# Altium PCB PCB prueba.PcbDoc
Units mm, origin at the board's own origin, x right, y up, seen from the top; angles counter-clockwise.
Board outline 72.52 x 73.28 mm, 2 copper layers (Top Layer, Bottom Layer); 36 components, 22 nets, 140 pads, 0 vias.
Unrouted connection lines stored in the file: 74.
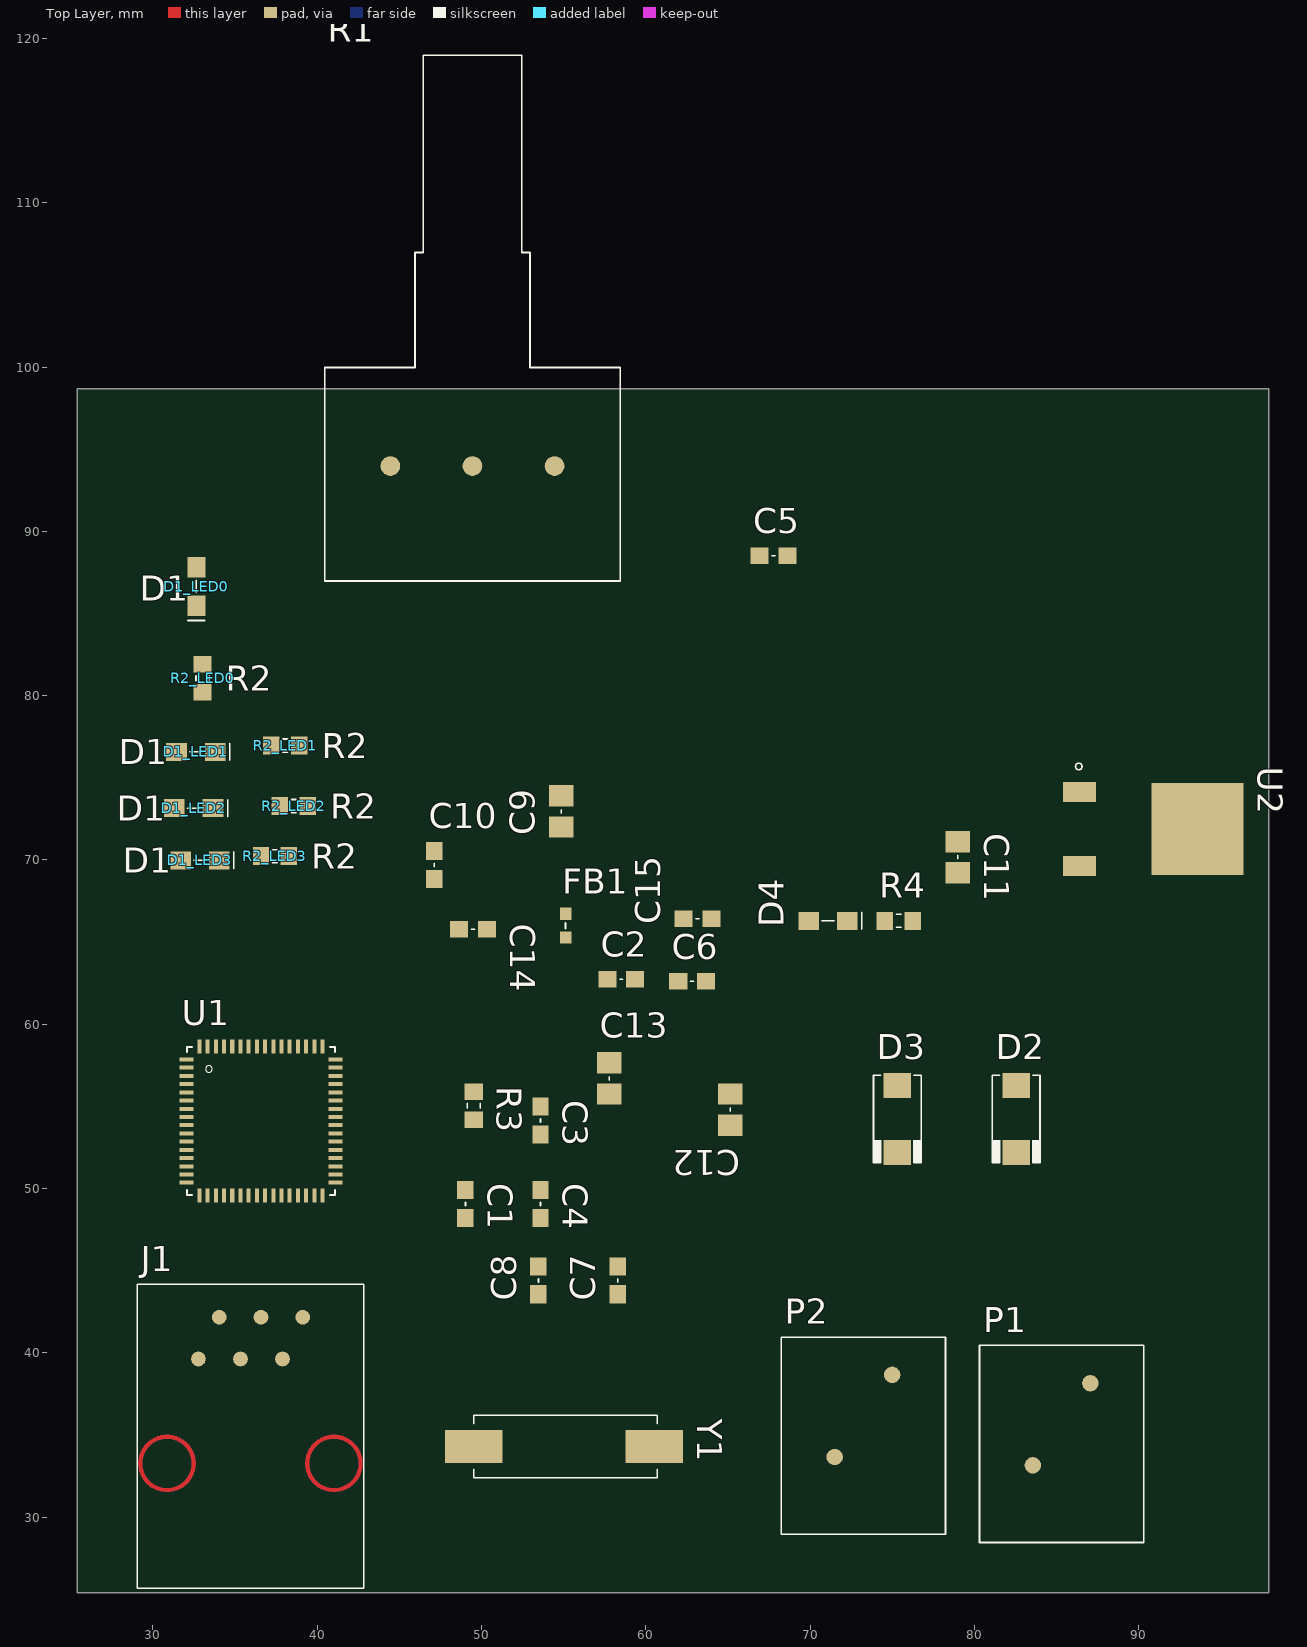
[diagram p0: Top Layer view]
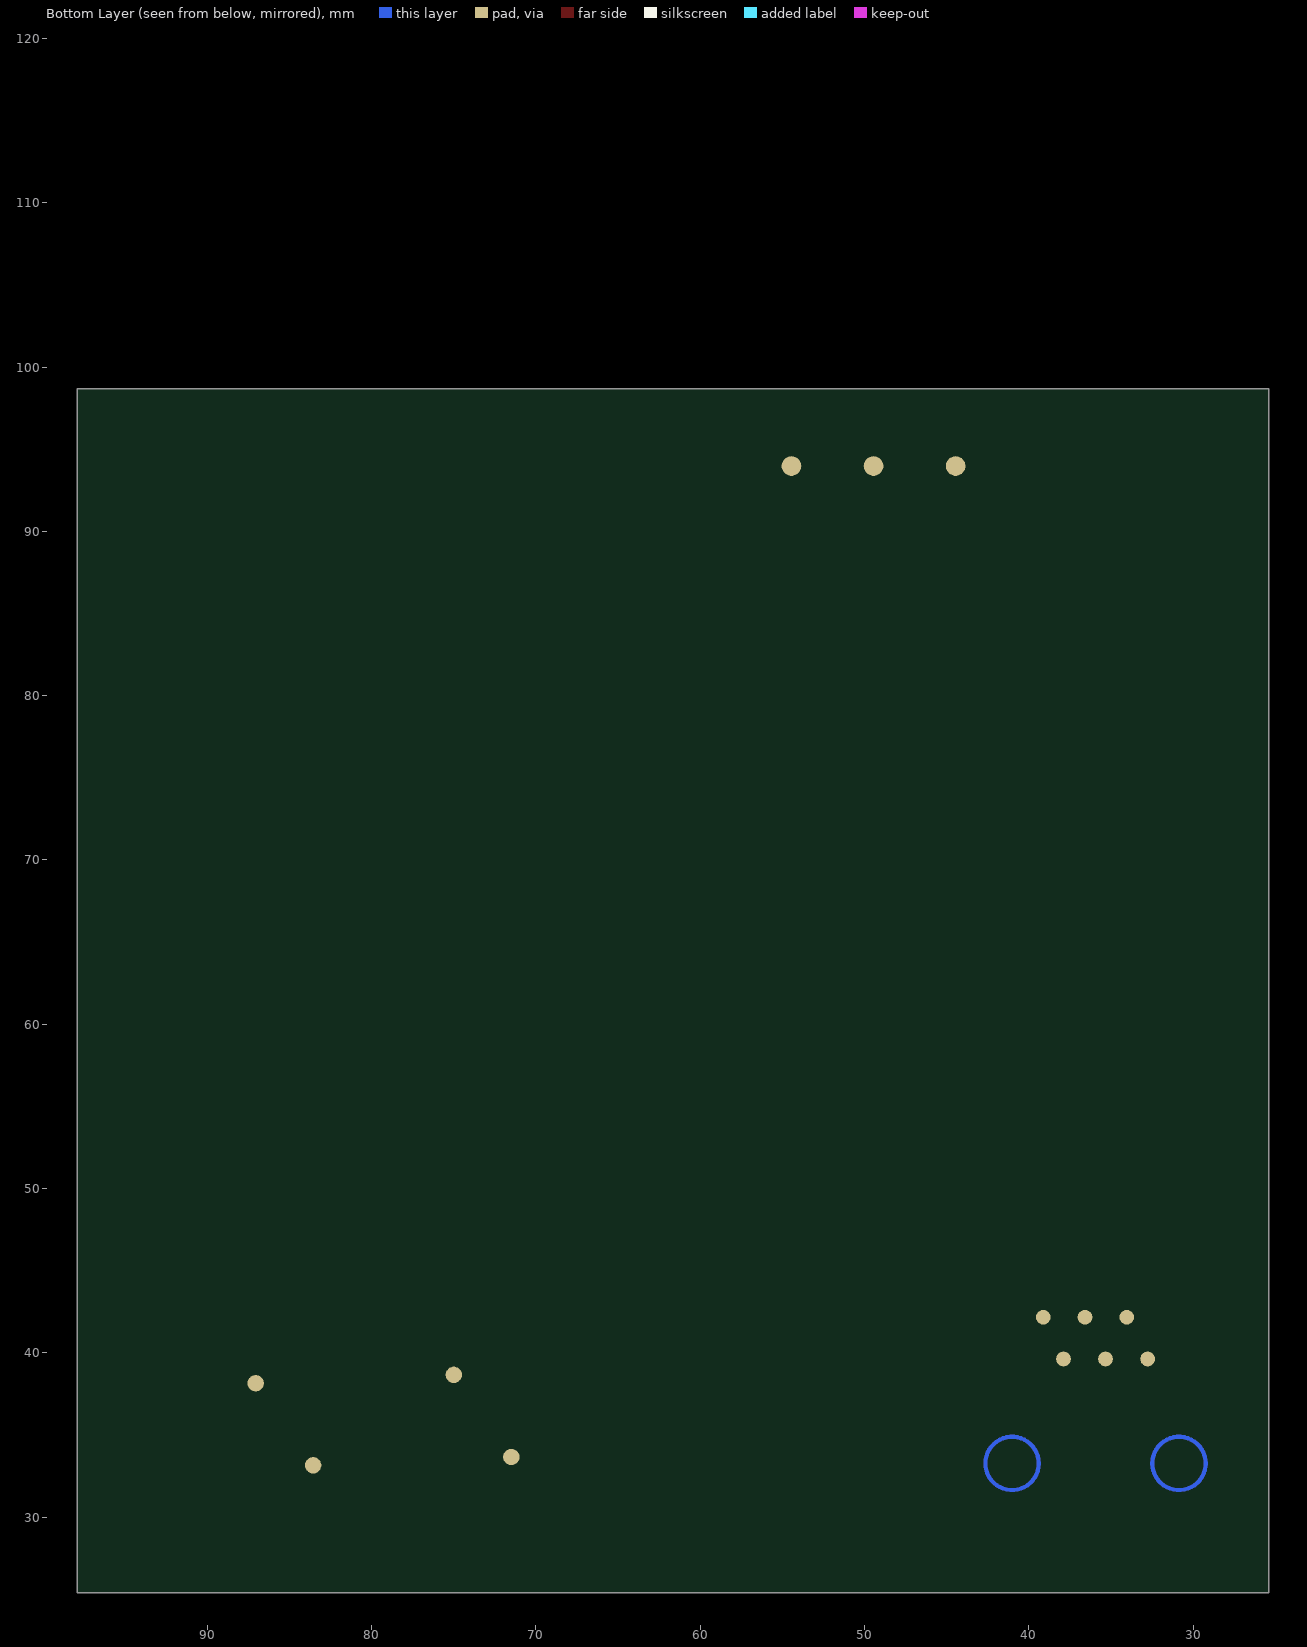
[diagram p1: Bottom Layer view, seen from below]

## Layer stack, top to bottom
Top Solder: solder mask 0.0102, Solder Resist, Dk 3.5
Top Layer: signal copper 0.0356
Dielectric 1: dielectric 0.32, FR-4, Dk 4.8
Bottom Layer: signal copper 0.0356
Bottom Solder: solder mask 0.0102, Solder Resist, Dk 3.5

## Board outline
25.4,25.4 97.917,25.4 97.917,98.679 25.4,98.679

## Design rules (kind name [scope] priority, off if disabled: settings)
Clearance [All] p1: gap=0.254
PolygonConnect [All] p1: connectstyle=Relief reliefconductorwidth=0.254 reliefentries=4 polygonreliefangle="90 Angle" airgapwidth=0.254
RoutingVias [All] p1: holewidth=0.711 width=1.27 viastyle="Through Hole" minholewidth=0.711 minwidth=1.27 maxholewidth=0.711 maxwidth=1.27
SolderMaskExpansion [All] p1: expansion=0.102
UnpouredPolygon [All] p1: allowunpoured=FALSE
Width [All] p1: maxlimit=0.254 minlimit=0.254 preferedwidth=0.254
29 further rules are at their usual default settings.

## Classes and differential pairs
component class LED0: D1_LED0 R2_LED0
component class LED1: D1_LED1 R2_LED1
component class LED2: D1_LED2 R2_LED2
component class LED3: D1_LED3 R2_LED3
component class PIC: C1 C2 C3 C4 C5 C6 C7 C8 C9 C10 J1 R3 U1 Y1
component class POWER: C11 C12 C13 C14 C15 D2 D3 D4 FB1 P1 P2 R4 U2
component class PROYECTO_PROBOT: R1
net class LED[0..3]: LED0 LED1 LED2 LED3
channel class led: LED0 LED1 LED2 LED3

## Components (designator, comment, footprint, x,y, rotation, side; value= is the part's Value field where it differs from the comment)
C1 "100nF" CAPC1608N 49.022,49.911 r270 top
C2 "100nF" CAPC1608N 57.658,62.738 r0 top
C3 "100nF" CAPC1608N 53.594,54.991 r270 top
C4 "100nF" CAPC1608N 53.594,49.911 r270 top
C5 "100nF" CAPC1608N 66.929,88.519 r0 top
C6 "100nF" CAPC1608N 61.976,62.611 r0 top
C7 "20pF" CAPC1608N 58.293,43.561 r90 top
C8 "20pF" CAPC1608N 53.467,43.561 r90 top
C9 "10uF 4V" CAP2012N 54.864,72.009 r90 top
C10 "1uF 4V" CAPC1608N 47.117,68.834 r90 top
C11 "Comment" CAP2012N 78.994,71.12 r270 top
C12 "Comment" CAP2012N 65.151,55.753 r270 top
C13 "Comment" CAP2012N 57.785,55.753 r90 top
C14 "Comment" CAPC1608N 48.641,65.786 r0 top
C15 "Comment" CAPC1608N 64.008,66.421 r180 top
D1_LED0 "D1" LED_0805 32.639,85.471 r90 top (schematic designator D1)
D1_LED1 "D1" LED_0805 33.782,76.581 r180 top (schematic designator D1)
D1_LED2 "D1" LED_0805 33.655,73.152 r180 top (schematic designator D1)
D1_LED3 "D1" LED_0805 34.036,69.977 r180 top (schematic designator D1)
D2 "GF1A" DO-214AC_21 82.55,52.197 r90 top
D3 "GF1A" DO-214AC_21 75.311,52.197 r90 top
D4 "Green LED" LED_0805 72.263,66.294 r180 top
FB1 "Comment" INDC1608AN 55.118,65.278 r90 top
J1 "Comment" RJ12_90 34.036,42.164 r0 top
P1 "Comment" PHOENIX_1985195 83.566,33.147 r0 top
P2 "Comment" PHOENIX_1985195 71.501,33.655 r0 top
R1 "1K" PDB181-K415K-102A2 44.45,93.98 r0 top
R2_LED0 "R2" RESC1608N 33.02,81.915 r270 top (schematic designator R2)
R2_LED1 "R2" RESC1608N 37.211,76.962 r0 top (schematic designator R2)
R2_LED2 "R2" RESC1608N 37.719,73.279 r0 top (schematic designator R2)
R2_LED3 "R2" RESC1608N 36.576,70.231 r0 top (schematic designator R2)
R3 "4.7K" RESC1608N 49.53,55.88 r270 top
R4 "Comment" RESC1608N 74.549,66.294 r0 top
U1 "PIC32MX764F128H-I/PT" QFP50P1200X1200X120-64 36.576,54.102 r0 top
U2 "" TD03B_N 93.599,71.882 r270 top
Y1 "8MHz" 4H_SMX_CRYSTAL 49.53,34.29 r0 top

## Footprints (in the part's own frame and the unit in brackets; to place one, negate y for a bottom-side part, rotate by r counter-clockwise, add the part's x,y. Pads: shape width x height; smd on the part's side, far side on the other; paste and mask are expansions set on the pad)
4H_SMX_CRYSTAL [mm]
  rect 3.5x2 smd: 1(0,0) 2(11,0)
  silkscreen extent 0,-1.91 11.18,1.91
CAP2012N [mm]
  rect 1.3x1.5 smd: 1(0,0) 2(1.9,0)
  silkscreen extent 0.85,0 1.05,0
CAPC1608N [mm]
  rect 1.1x1 smd: 1(0,0) 2(1.7,0)
  silkscreen extent 0.75,0 0.95,0
DO-214AC_21 [mm]
  rect 1.52x1.68 smd: 1(0,0) 2(4.06,0)
  silkscreen extent -0.64,-1.45 4.7,1.45
INDC1608AN [mm]
  rect 0.75x0.7 smd: 1(0,0) 2(1.45,0)
  silkscreen extent 0.55,0 0.9,0
LED_0805 [mm]
  rect 1.25x1.1 smd: 1(0,0) 2(2.35,0)
  silkscreen extent -0.89,-0.51 1.55,0.51
PDB181-K415K-102A2 [mm]
  round 1.2 all layers, no hole: 1(0,0) 2(5,0) 3(10,0)
  silkscreen extent -4,-7 14,25
PHOENIX_1985195 [mm]
  round 1 all layers, no hole: 1(0,0) 2(3.5,5)
  silkscreen extent -3.25,-4.7 6.75,7.3
QFP50P1200X1200X120-64 [mm]
  rect 0.84x0.245 smd: 1(-4.535,3.75) 2(-4.535,3.25) 3(-4.535,2.75) 4(-4.535,2.25) 5(-4.535,1.75) 6(-4.535,1.25) 7(-4.535,0.75) 8(-4.535,0.25) 9(-4.535,-0.25) 10(-4.535,-0.75) 11(-4.535,-1.25) 12(-4.535,-1.75) 13(-4.535,-2.25) 14(-4.535,-2.75) 15(-4.535,-3.25) 16(-4.535,-3.75) 33(4.535,-3.75) 34(4.535,-3.25) 35(4.535,-2.75) 36(4.535,-2.25) 37(4.535,-1.75) 38(4.535,-1.25) 39(4.535,-0.75) 40(4.535,-0.25) 41(4.535,0.25) 42(4.535,0.75) 43(4.535,1.25) 44(4.535,1.75) 45(4.535,2.25) 46(4.535,2.75) 47(4.535,3.25) 48(4.535,3.75)
  rect 0.245x0.84 smd: 17(-3.75,-4.535) 18(-3.25,-4.535) 19(-2.75,-4.535) 20(-2.25,-4.535) 21(-1.75,-4.535) 22(-1.25,-4.535) 23(-0.75,-4.535) 24(-0.25,-4.535) 25(0.25,-4.535) 26(0.75,-4.535) 27(1.25,-4.535) 28(1.75,-4.535) 29(2.25,-4.535) 30(2.75,-4.535) 31(3.25,-4.535) 32(3.75,-4.535) 49(3.75,4.535) 50(3.25,4.535) 51(2.75,4.535) 52(2.25,4.535) 53(1.75,4.535) 54(1.25,4.535) 55(0.75,4.535) 56(0.25,4.535) 57(-0.25,4.535) 58(-0.75,4.535) 59(-1.25,4.535) 60(-1.75,4.535) 61(-2.25,4.535) 62(-2.75,4.535) 63(-3.25,4.535) 64(-3.75,4.535)
  silkscreen extent -4.5,-4.5 4.5,4.5
RESC1608N [mm]
  rect 1x1.1 smd: 1(0,0) 2(1.7,0)
  silkscreen extent 0.7,-0.4 1,0.4
RJ12_90 [mm]
  round 0.9 all layers, no hole: 1(0,0) 2(2.54,0) 3(5.08,0) 4(-1.27,-2.54) 5(1.29,-2.54) 6(3.85,-2.54)
  Multi-Layer circle w0.254: c-3.18,-8.9 r1.625
  Multi-Layer circle w0.254: c6.98,-8.9 r1.625
  silkscreen extent -5,-16.5 8.8,2
TD03B_N [mm]
  rect 5.6x5.6 smd: 1(0,0)
  rect 1.2x2 smd: 3(2.25,-7.2) 4(-2.25,-7.2)
  silkscreen extent -4.01,-7.44 -3.61,-7.04

## Part data
C1 C2 C3 C4 C5 C6 C7 C8 C9 C10 C11 C12 C13 C14 C15: library part Cap, "Capacitor"
D1_LED0 D1_LED1 D1_LED2 D1_LED3: library part LED0, "Typical INFRARED GaAs LED"
D2 D3: library part Diode, "Default Diode"
D4: library part LED2, "Typical RED, GREEN, YELLOW, AMBER GaAs LED"
FB1: library part Inductor, "Inductor"
J1: library part "Header 6", "Header, 6-Pin"
P1 P2: library part "Header 2H", "Header, 2-Pin, Right Angle"
R1: library part RPot, "Potentiometer"
R2_LED0 R2_LED1 R2_LED2 R2_LED3 R3 R4: library part Res1, "Resistor"
U1: library part Component_1
U2: library part MHDR2X2, "Header, 2-Pin, Dual row"
Y1: library part XTAL, "Crystal Oscillator"

## Nets (pads, with @x,y where several pads share a name; then routed paths per layer and width w, separated by ;. In a path a pad name is that pad's centre, name@x,y a point inside that pad or via, vN(x,y) a via of type N, cw(c..) or ccw(c..) an arc to the next point about the centre after c; other vN are vias at no path point)
ALIM: D2.1 P1.1
BATTERY: D3.1 P2.1
GND: C1.2 C2.2 C3.2 C4.2 C5.2 C6.2 C7.2 C8.2 C9.1 C10.1 C11.1 C12.1 C13.1 C14.1 C15.1 D1_LED0.2 D1_LED1.2 D1_LED2.2 D1_LED3.2 D4.2 J1.3 P1.2 P2.2 R1.1 U1.9 U1.20 U1.25 U1.41 U2.1
LED0: R2_LED0.2 U1.46
LED1: R2_LED1.2 U1.49
LED2: R2_LED2.2 U1.50
LED3: R2_LED3.2 U1.51
MCLR: J1.1 R3.1 U1.7
NetD1_LED0_1: D1_LED0.1 R2_LED0.1
NetD1_LED1_1: D1_LED1.1 R2_LED1.1
NetD1_LED2_1: D1_LED2.1 R2_LED2.1
NetD1_LED3_1: D1_LED3.1 R2_LED3.1
NetD4_1: D4.1 R4.1
NetR1_3: R1.3 U1.14
PGC: J1.5 U1.15
PGD: J1.4 U1.16
V3P3: C1.1 C2.1 C3.1 C4.1 C5.1 C13.2 C14.2 FB1.1 J1.2 R3.2 U1.10 U1.26 U1.35 U1.38 U1.57 U2.4
V3P3A: C6.1 C15.2 FB1.2 R1.2 U1.19
V5: C11.2 C12.2 D2.2 D3.2 R4.2 U2.3
VCAP: C9.2 C10.2 U1.56
X1: C7.1 U1.39 Y1.2
X2: C8.1 U1.40 Y1.1
pads on no net: J1.6 U1.1 U1.2 U1.3 U1.4 U1.5 U1.6 U1.8 U1.11 U1.12 U1.13 U1.17 U1.18 U1.21 U1.22 U1.23 U1.24 U1.27 U1.28 U1.29 U1.30 U1.31 U1.32 U1.33 U1.34 U1.36 U1.37 U1.42 U1.43 U1.44 U1.45 U1.47 U1.48 U1.52 U1.53 U1.54 U1.55 U1.58 U1.59 U1.60 U1.61 U1.62 U1.63 U1.64